# Altium PCB CH32V203F8U6-R0-1v0.PcbDoc
Units mil, origin at the board's own origin, x right, y up, seen from the top; angles counter-clockwise.
Board outline 1440.41 x 1803.86 mil, 2 copper layers (Top Layer, Bottom Layer); 21 components, 33 nets, 104 pads, 255 vias.
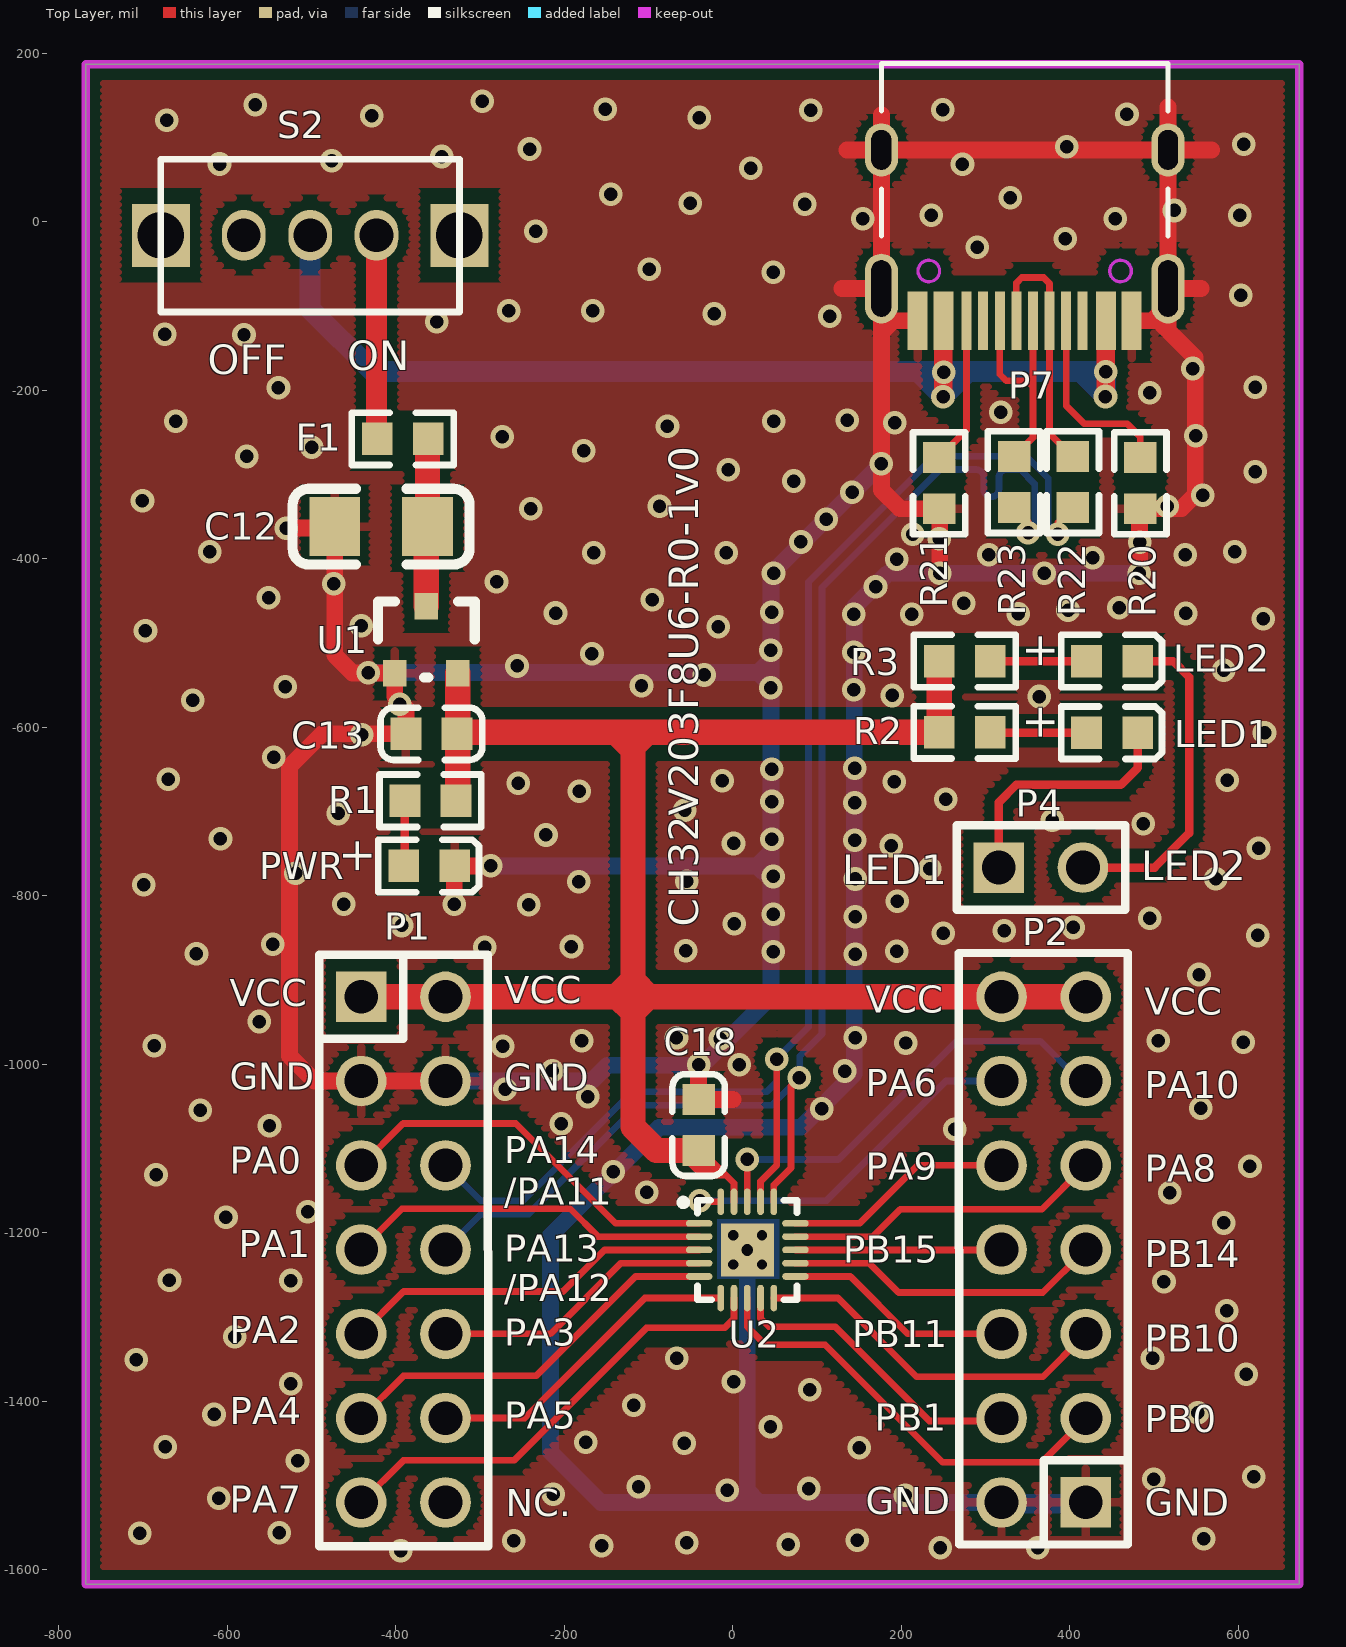
[diagram p0: Top Layer view]
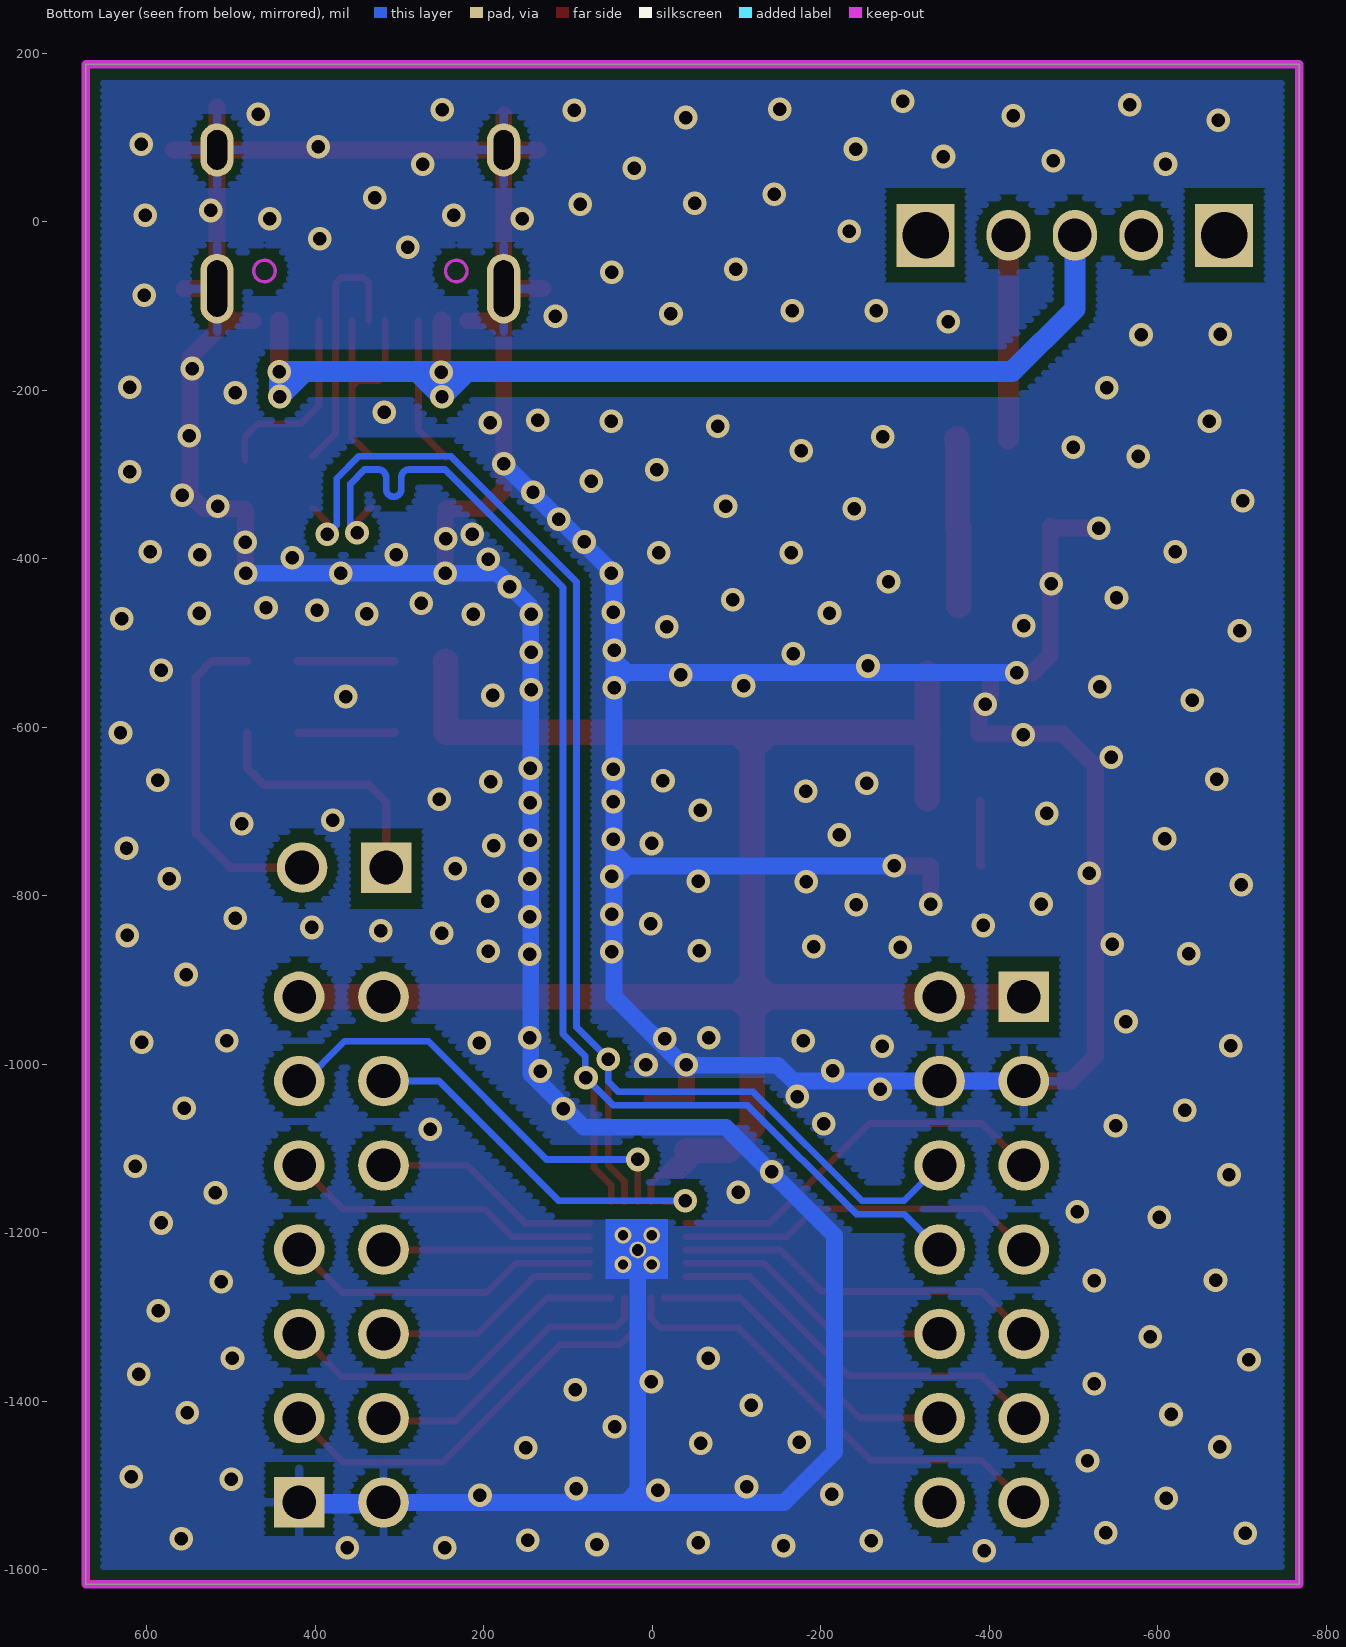
[diagram p1: Bottom Layer view, seen from below]

## Layer stack, top to bottom
Top Solder: solder mask 0.4, Solder Resist, Dk 3.5
Top Layer: signal copper 1.4
Dielectric 1: dielectric 12.6, FR-4, Dk 4.8
Bottom Layer: signal copper 1.4
Bottom Solder: solder mask 0.4, Solder Resist, Dk 3.5

## Board outline
-767.99,-1617.2 -767.99,186.66 672.42,186.66 672.42,-1617.2

## Design rules (kind name [scope] priority, off if disabled: settings)
Clearance Clearance_1 [InPolygon] p1: gap=12 ignorepadtopadclearanceinfootprint=FALSE
Clearance [All] p2: gap=6 ignorepadtopadclearanceinfootprint=FALSE
ComponentClearance [All] p1: gap=0 collisioncheckmode=3 verticalgap=0 showdistances=FALSE
DiffPairsRouting [All] p1: maxlimit=10 minlimit=6 mostfreqgap=8 toplayer_minwidth=6 toplayer_maxwidth=15 toplayer_prefwidth=8 bottomlayer_minwidth=6 bottomlayer_maxwidth=15 bottomlayer_prefwidth=8 maxuncoupledlength=500
PolygonConnect PolygonConnect_1 [IsVia] p1: connectstyle=Direct reliefconductorwidth=10 reliefentries=4 polygonreliefangle="90 Angle" airgapwidth=10
PolygonConnect [All] p2: connectstyle=Relief reliefconductorwidth=10 reliefentries=4 polygonreliefangle="90 Angle" airgapwidth=10
RoutingVias [All] p1: holewidth=16 width=28 viastyle="Through Hole" minholewidth=12 minwidth=18 maxholewidth=28 maxwidth=50
SolderMaskExpansion [All] p1: expansion=4 istentingtop=FALSE
Width [All] p1: maxlimit=100 minlimit=6 preferedwidth=10 minimp=50.000000 maximp=50.000000 favimp=50.000000
28 further rules are at their usual default settings.

## Classes and differential pairs
differential pair US: +PA13/PA12 -PA14/PA11
differential pair usb: +PA11 -PA12

## Components (designator, comment, footprint, x,y, rotation, side; value= is the part's Value field where it differs from the comment)
C12 "10uF" 3216_C -362.33,-361.95 r0 top
C13 "2.2uF" 0603_C -387.9,-607.79 r0 top
C18 "0.1uF" 0603_C -40.52,-1102.4 r90 top value=15pF
F1 "500mA" 0603 -422.01,-257.7 r0 top
LED1 "LED1   blue" 0603+ 420,-606.53 r0 top
LED2 "LED2  blue" 0603+ 420,-521.53 r0 top
P1 "Header 7X2" IDC14-2.54mm -440.96,-919.93 r0 top locked
P2 "Header 7X2" IDC14-2.54mm 418.96,-1519.93 r180 top
P4 "2HEAD" SIP2-2.54mm 315.6,-766.51 r270 top
P7 "TYPE-C" TYPE-C-Receptacle-2.0 346.4,-117.6 r180 top locked
PWR "POWER  red" 0603+ -390.51,-764.63 r0 top
R1 "1K" 0603 -389.09,-687.23 r0 top
R2 "1K" 0603 245,-606.06 r0 top
R3 "1K" 0603 245,-521.53 r0 top
R20 "NC(5.1K)" 0603 483.68,-280.01 r270 top
R21 "NC(5.1K)" 0603 244.93,-280.01 r270 top
R22 "0R" 0603 403.45,-278.79 r270 top
R23 "0R" 0603 333.81,-278.8 r270 top
S2 "SW" SW1 -501.54,-16.15 r0 top
U1 "6219P33M" SOT-23 -401.22,-535.76 r0 top
U2 "CH32V203F8U" QFN20_3x3 17.23,-1220.3 r270 top

## Footprints (in the part's own frame and the unit in brackets; to place one, negate y for a bottom-side part, rotate by r counter-clockwise, add the part's x,y. Pads: shape width x height; smd on the part's side, far side on the other; paste and mask are expansions set on the pad)
0603 [mm]
  rect 0.93x0.98 smd: 1(0,0) 2(1.54,0)
  silkscreen extent -0.76,-0.79 2.3,0.79
0603+ [mm]
  rect 0.93x0.98 smd: 1(0,0) 2(1.54,0)
  silkscreen extent -0.76,-0.79 2.27,0.79
0603_C [mm]
  rect 0.93x0.98 smd: 1(0,0) 2(1.54,0)
  silkscreen extent -0.76,-0.79 2.31,0.79
3216_C [mil]
  rect 60x70 smd: 1(0,0) 2(-110,0)
  silkscreen extent -160,-45 50,45
IDC14-2.54mm [mil]
  rect 60x60 hole 40: 1(0,0)
  round 60 hole 40: 2(100,0) 3(0,-100) 4(100,-100) 5(0,-200) 6(100,-200) 7(0,-300) 8(100,-300) 9(0,-400) 10(100,-400) 11(0,-500) 12(100,-500) 13(0,-600) 14(100,-600)
  silkscreen extent -50,-652 151,50
QFN20_3x3 [mm]
  rect 1.6x1.6 smd mask+0.051: 0(0,0)
  round 0.508 hole 0.356: 0(0,0)
  oval 0.2x0.8 smd mask+0.051: 1(-0.8,-1.451) 2(-0.4,-1.451) 3(0,-1.451) 4(0.4,-1.451) 5(0.8,-1.451) 11(0.8,1.451) 12(0.4,1.451) 13(0,1.451) 14(-0.4,1.451) 15(-0.8,1.451)
  oval 0.8x0.2 smd mask+0.051: 6(1.451,-0.8) 7(1.451,-0.4) 8(1.451,0) 9(1.451,0.4) 10(1.451,0.8) 16(-1.451,0.8) 17(-1.451,0.4) 18(-1.451,0) 19(-1.451,-0.4) 20(-1.451,-0.8)
  silkscreen extent -1.53,-2.03 1.5,1.5
SIP2-2.54mm [mil]
  rect 60x60 hole 40: 1(0,0)
  round 60 hole 40: 2(0,100)
  silkscreen extent -50,-50 50,150
SOT-23 [mm]
  rect 0.7x0.8 smd: 1(0,0) 2(1.9,0) 3(0.95,2.02)
  silkscreen extent -0.51,-0.13 2.41,2.16
SW1 [mm]
  rect 1.75x1.9 hole 1.4: 0(-4.5,0) 0(4.5,0)
  oval 1.321x1.524 hole 1.016: 1(0,0) 2(-2,0) 3(2,0)
  silkscreen extent -4.51,-2.31 4.5,2.29
TYPE-C-Receptacle-2.0 [mm]
  oval 1x2.1 hole 0.6 slot 1.7 at 90 deg: 0(-4.32,-0.97) 0(4.32,-0.97)
  oval 1x1.6 hole 0.6 slot 1.2 at 90 deg: 0(-4.32,-5.15) 0(4.32,-5.15)
  rect 0.6x1.75 smd: A1(-3.225,0) A4(-2.45,0) B1(3.225,0) B4(2.45,0)
  rect 0.3x1.75 smd: A5(-1.25,0) A6(-0.25,0) A7(0.25,0) A8(1.25,0) B5(1.75,0) B6(0.75,0) B7(-0.75,0) B8(-1.75,0)
  Keep-Out Layer circle w0.1: c2.89,-1.5 r0.325
  Keep-Out Layer circle w0.1: c-2.89,-1.5 r0.325
  silkscreen extent -4.32,-7.75 4.32,-2.55

## Part data
C12 C13: library part CAP, "Capacitor"
C18: library part Cap, "Capacitor", LatestRevisionDate=17-Jul-2002, LatestRevisionNote="Re-released for DXP Platform.", PackageReference=RAD-0.3, Published=8-Jun-2000, Publisher="Altium Limited"
F1: library part FUSE1, "Fuse"
LED1 LED2 PWR: library part LED0, "Typical INFRARED GaAs LED", LatestRevisionDate=08-Jul-2005, LatestRevisionNote="Mech Layer 1 removed.", PackageReference=LED-0, Published=8-Jun-2000, Publisher="Altium Limited"
P1 P2: "Header, 7-Pin, Dual row", LatestRevisionDate=17-Jul-2002, LatestRevisionNote="Re-released for DXP Platform.", Publisher="Altium Limited"
P7: library part TYPE-C1
R1 R2 R3: library part "Res Semi", "Semiconductor Resistor", LatestRevisionDate=17-Jul-2002, LatestRevisionNote="Re-released for DXP Platform.", PackageReference=AXIAL-0.5, Published=8-Jun-2000, Publisher="Altium Limited"
R20 R21 R22 R23: library part Res2, "Resistor"
U2: "RISC-V LMD-MCU, 144MHz, for motor & wireless charging"

## Via types
v1: diameter 28, hole 16, Top Layer to Bottom Layer, tented both sides, 251 vias
v2: diameter 20, hole 12, Top Layer to Bottom Layer, tented both sides, 4 vias

## Nets (pads, with @x,y where several pads share a name; then routed paths per layer and width w, separated by ;. In a path a pad name is that pad's centre, name@x,y a point inside that pad or via, vN(x,y) a via of type N, cw(c..) or ccw(c..) an arc to the next point about the centre after c; other vN are vias at no path point)
+5V: P7.A4 P7.B4 S2.1 | length 1430.3
  Top Layer w22: v1@249.94,-210.35 P7.B4 ; v1(442.29,-207.51) 442.86,-206.94 P7.A4
  Bottom Layer w25: S2.1 -501.54,-103.6 -427.1,-178.05 220,-178.05 ; 220,-178.05 v1@250.29,-178.05 ; 220,-178.05 v1(249.52,-207.57) ; v1(249.52,-207.57) 279.04,-178.05 ; v1(249.52,-207.57) 249.52,-178.82 v1@250.29,-178.05 ; v1@250.29,-178.05 279.04,-178.05 ; 279.04,-178.05 412.83,-178.05 ; 412.83,-178.05 v1(442.88,-178.05) 442.29,-178.63 v1(442.29,-207.51) 412.83,-178.05
  other v1: 250.29,-178.74
GND: C12.2 C13.1 C18.2 P1.3 P1.4 P2.1 P2.2 P7.0 P7.A1 P7.B1 PWR.2 R20.2 R21.2 U1.1 U2.0 | length 8178.7
  Top Layer w20: v1(-529.89,-363.75) -474.13,-363.75 C12.2 -472.33,-514.62 -451.19,-535.76 U1.1 -401.22,-563.67 -387.9,-576.99 C13.1 -487.5,-607.79 -526.13,-646.42 -526.13,-990.22 -496.41,-1019.93 P1.3 P1.4 ; v1(-330.58,-810.29) -330.58,-765.32 PWR.2 v1(-287.17,-764.63) ; v1(-40.52,-1000.57) C18.2 0.15,-1041.77 ; 129.6,-79.41 P7.0@164.8,-79.41 ; 135.54,85.16 P7.0@164.53,85.16 ; 176.32,126.9 P7.0@176.32,96.95 ; P7.B1 189.98,-117.6 ; v1(245.61,-417.28) 245.61,-348.26 241.46,-344.11 R21.2 198.2,-340.64 176.32,-318.76 176.32,-131.26 ; P7.A1 497.94,-117.6 ; v1(482.59,-417.18) 482.59,-345.91 481.9,-345.22 R20.2@483.68,-343.44 ; R20.2 532.42,-340.64 548.8,-324.26 548.8,-161.26 516.48,-128.94 ; P7.0@516.48,-64.59 P7.0@516.48,-65.54 ; 516.48,136.02 P7.0@516.48,97.35 ; 555.6,-79.41 P7.0@530.35,-79.41 ; 568.34,85.16 P7.0@528.67,85.16 ; P7.0@164.53,85.16 P7.0@176.32,96.95 ; P7.0@164.53,85.16 P7.0@176.32,73.36 ; P7.0@164.53,85.16 P7.0@176.32,85.16 ; P7.0@164.8,-79.41 P7.0@176.32,-90.93 ; P7.0@164.8,-79.41 P7.0@176.32,-67.88 ; P7.0@164.8,-79.41 P7.0@176.32,-79.41 ; 176.32,-131.26 P7.0@176.32,-116.55 ; 176.32,-131.26 189.98,-117.6 ; P7.0@176.32,-116.55 P7.0@176.32,-103.93 ; P7.0@176.32,-116.55 177.37,-117.6 189.98,-117.6 ; P7.0@176.32,-103.93 P7.0@176.32,-90.93 ; P7.0@176.32,-103.93 189.98,-117.6 ; P7.0@176.32,-90.93 P7.0@176.32,-79.41 ; P7.0@176.32,-79.41 P7.0@176.32,-67.88 ; P7.0@176.32,-67.88 P7.0@176.32,73.36 ; P7.0@176.32,73.36 P7.0@188.12,85.16 ; P7.0@176.32,73.36 P7.0@176.32,85.16 ; P7.0@176.32,85.16 P7.0@176.32,96.95 ; P7.0@176.32,85.16 P7.0@188.12,85.16 ; P7.0@176.32,96.95 P7.0@188.12,85.16 ; P7.0@188.12,85.16 P7.0@504.29,85.16 ; 497.94,-117.6 505.14,-117.6 ; 497.94,-117.6 P7.0@516.48,-99.05 ; P7.0@504.29,85.16 P7.0@516.48,72.97 ; P7.0@504.29,85.16 P7.0@516.48,97.35 ; P7.0@504.29,85.16 P7.0@516.48,85.16 ; 505.14,-117.6 515.32,-117.6 P7.0@516.48,-116.43 ; 505.14,-117.6 516.48,-128.94 ; 516.48,-128.94 P7.0@516.48,-116.43 ; P7.0@516.48,-116.43 P7.0@516.48,-99.05 ; P7.0@516.48,-99.05 P7.0@516.48,-93.28 ; P7.0@516.48,-93.28 P7.0@530.35,-79.41 ; P7.0@516.48,-93.28 P7.0@516.48,-79.41 ; P7.0@516.48,-79.41 P7.0@516.48,-65.54 ; P7.0@516.48,-79.41 P7.0@530.35,-79.41 ; P7.0@516.48,-65.54 P7.0@530.35,-79.41 ; P7.0@516.48,-65.54 P7.0@516.48,72.97 ; P7.0@516.48,72.97 P7.0@528.67,85.16 ; P7.0@516.48,72.97 P7.0@516.48,85.16 ; P7.0@516.48,85.16 P7.0@516.48,97.35 ; P7.0@516.48,85.16 P7.0@528.67,85.16 ; P7.0@516.48,97.35 P7.0@528.67,85.16
  Bottom Layer w20: P1.3 P1.4 -167.41,-1019.93 -148.63,-1001.15 -36.42,-1001.15 45.35,-919.38 v1@45.35,-780.96 ; v1(-432.7,-535.18) 30.15,-535.18 ; v1(-287.17,-764.63) 29.02,-764.63 ; U2.0@17.23,-1220.3 17.23,-1505.92 ; v1(176.2,-287.54) 45.35,-418.39 v1@45.35,-513.61 ; v1(245.61,-417.28) 183.91,-417.28 144.14,-457.05 144.14,-1011.76 81.1,-1074.8 -87.72,-1074.8 -216.16,-1203.24 -216.16,-1460.38 -156.6,-1519.93 3.21,-1519.93 ; v1@248.77,-417.18 v1(482.59,-417.18) ; P2.2@315.6,-1523.24 P2.1@415.6,-1523.24 ; P2.1 P2.2 31.25,-1519.93 ; 3.21,-1519.93 17.23,-1505.92 ; 3.21,-1519.93 15.23,-1519.93 ; 15.23,-1519.93 31.25,-1519.93 ; 15.23,-1519.93 17.23,-1517.93 17.23,-1505.92 ; 17.23,-1505.92 31.25,-1519.93 ; 29.02,-764.63 45.35,-748.3 ; 29.02,-764.63 v1@45.35,-780.96 ; 29.02,-764.63 43.57,-764.63 45.35,-762.85 ; 30.15,-535.18 44.81,-520.52 44.81,-514.15 v1@45.35,-513.61 ; 30.15,-535.18 41.09,-535.18 45.35,-530.92 ; 30.15,-535.18 v1@45.35,-550.37 ; v1@45.35,-780.96 45.35,-762.85 ; 45.35,-762.85 45.35,-748.3 ; 45.35,-748.3 v1@45.35,-550.37 ; v1@45.35,-550.37 45.35,-530.92 ; 45.35,-530.92 v1@45.35,-513.61
  other v1: -393.96,-1577.13 246.11,-1573.9 362.14,-1573.9 -155.77,-1571.59 65.6,-1569.93 -54.39,-1567.94 -260.05,-1565.49 147.92,-1564.97 559.09,-1563.05 -703.96,-1556.78 -538.44,-1556.18 -609.85,-1515.23 204.45,-1511.42 -212.86,-1510.32 -6.79,-1505.47 90.4,-1503.48 -111.9,-1501.26 499.75,-1492.65 618.42,-1489.48 -516.54,-1470.35 149.9,-1454.89 -673.44,-1454.18 -57.58,-1449.73 -174.57,-1448.34 44.78,-1430.09 -615.66,-1415.63 551.97,-1413.54 -117.47,-1404.48 91.39,-1386.46 -524.41,-1379.26 0.9,-1376.62 609.58,-1368.06 -708.19,-1350.73 -66.64,-1348.77 498.17,-1348.66 -590.98,-1323.22 586.18,-1292.44 511.74,-1258.25 -524.41,-1256.65 -668.51,-1256.18 582.61,-1188.32 -601.48,-1181.33 -504.28,-1175.21 -101.89,-1151.98 518.36,-1152.41 -684.48,-1131.15 -141.89,-1127.48 613.8,-1121.23 263.28,-1077.16 -549.82,-1072.74 -203.41,-1070.76 -632.14,-1054.35 105.38,-1052.7 555.21,-1052.25 -171.94,-1038.28 -270.3,-1029.79 -214.33,-1007.7 133.11,-1008.03 7.44,-1000.55 -272.78,-978.66 -686.61,-977.79 205.4,-974.74 605.76,-973.68 -179.32,-972.1 505.13,-971.93 -14.69,-969.91 145.43,-968.76 -66.82,-968.28 -562.2,-949.29 553.31,-893.49 -636.5,-868.94 145.49,-869.33 47.87,-866.36 194.51,-865.86 -55.78,-865.46 -294.29,-861.34 -191.44,-860.28 -545.79,-857.71 623.16,-847.11 249.65,-844.61 322.36,-841.38 404.29,-837.66 -392.87,-835.25 1.78,-833.09 495.01,-826.54 145.49,-824.7 47.87,-821.74 -461.54,-809.8 -242.34,-810.44 195.24,-806.53 -699.05,-786.78 -182.95,-783.3 -54.59,-782.73 145.49,-780.08 573.33,-779.86 47.87,-777.12 -518.79,-773.34 233.97,-767.7 623.96,-743.47 187.93,-740.38 0.87,-737.94 144.63,-734.17 46.51,-732.79 -607.98,-732.43 -221.7,-727.86 487.1,-714.55 379.05,-710.58 -468.05,-702.35 -57.08,-698.47 144.63,-689.55 46.51,-688.17 252.97,-685.32 -182.22,-675.79 -254.45,-666.55 -12.72,-663.67 191.46,-664.47 586.78,-662.78 -670.18,-661.68 46.05,-649.87 144.53,-648.87 -544.92,-635.68 -440.48,-608.77 631.08,-606.61 -395.24,-572.89 -641.07,-567.8 363.84,-563.54 189.34,-562.32 143.57,-555.61 45.05,-553.08 -531.17,-551.95 -108.33,-550.94 -33.98,-537.97 582.82,-532.24 -256.05,-527.28 -167.12,-512.89 143.57,-510.99 45.05,-508.46 -696.99,-485.69 -17.41,-480.52 -441.03,-479.6 629.5,-471.33 143.7,-466.03 212.58,-465.79 338.8,-465.59 537.73,-465 -210.35,-464.48 46.29,-463.42 397.87,-461.2 458.41,-458.27 274.34,-452.9 -95.36,-448.92 -550.97,-446.48 169.4,-433.32 -473.4,-429.69 -280.39,-427.3 48.38,-417.15 369.55,-417.24 194.47,-400.78 427.17,-398.7 303.64,-395.16 536.94,-395.38 -164.92,-392.97 -7.82,-392.97 -620.84,-391.69 595.86,-391.92 482.83,-380.63 80.92,-380.12 244.87,-376.13 213.83,-370.76 110.78,-353.25 -239.73,-340.72 -86.97,-337.81 515.54,-337.67 -700.56,-330.99 557.67,-324.77 141.53,-321.01 72.53,-307.83 620.17,-297 -5.41,-294.62 -576.82,-278.64 -176.65,-272.01 -499.63,-267.51 -273.53,-255.11 549.57,-254.18 -77.51,-242.72 192.28,-238.44 -661.3,-236.99 48.54,-237.06 136.09,-235.87 318.16,-226.01 495.01,-203.14 -539.18,-197.22 620.18,-196.31 546.09,-174.31 -674.29,-133.74 -580.07,-134.36 -351.21,-118.62 114.87,-112.39 -22.21,-109.45 -266.01,-105.53 -166.2,-105.82 602.81,-87.51 47.97,-60.09 -99.31,-56.23 290.06,-30.28 394.5,-20.41 -233.71,-11.54 154.36,3.68 454.06,3.68 601.66,7.39 235.47,7.8 524.18,13.3 85.5,20.77 -50.6,21.75 329.19,28.26 -144.59,32.53 21.36,63.4 -609.12,68.39 272.59,68.29 -475.93,72.49 -345.62,77.31 -241.23,86.22 396.32,88.91 606.29,91.88 -671.55,120.58 -39.83,123.58 -428.38,125.84 467.81,127.41 92.34,132.39 -151.46,133.38 249.22,132.91 -566.81,138.67 -297.1,142.95
  other v2: 0.6,-1237.7 34.9,-1237.7 0.6,-1202.9 34.9,-1202.9
LED1: LED1.2 P4.1 | length 301.1
  Top Layer w10: P4.1 315.6,-689.16 336.27,-668.5 460.44,-668.5 480.63,-648.31 LED1.2
LED2: LED2.2 P4.2 | length 396.9
  Top Layer w10: P4.2 500.65,-766.51 541.59,-725.57 541.59,-540.37 522.75,-521.53 LED2.2
NetC12_1: C12.1 F1.2 U1.3 | length 199.5
  Top Layer w30: U1.3 -363.82,-363.44 C12.1 -362.33,-258.65 F1.2
NetF1_1: F1.1 S2.3 | length 241.9
  Top Layer w25: S2.3 -422.8,-256.9 F1.1
NetLED1_1: LED1.1 R2.2 | length 114.6
  Top Layer w10: R2.2 306.1,-606.53 LED1.1
NetLED2_1: LED2.1 R3.2 | length 114.4
  Top Layer w10: R3.2 LED2.1
NetP7_A5: P7.A5 R20.1 | length 231.5
  Top Layer w8: P7.A5 395.61,-218.14 417.35,-239.88 468.22,-239.88 483.68,-255.35 R20.1 R20.1@483.68,-282.81
NetP7_B5: P7.B5 R21.1 | length 175.9
  Top Layer w8: R21.1 277.5,-247.44 P7.B5
NetPWR_1: PWR.1 R1.1 | length 78
  Top Layer w10: PWR.1 -389.09,-763.2 R1.1
PA0: P1.5 U2.1 | length 470.8
  Top Layer w8: P1.5 -391.19,-1070.16 -257.53,-1070.16 -138.89,-1188.8 U2.1
PA1: P1.7 U2.2 | length 434.8
  Top Layer w8: P1.7 -392.53,-1171.51 -192.86,-1171.51 -159.81,-1204.55 U2.2
PA2: P1.9 U2.3 | length 442.3
  Top Layer w8: P1.9 -390.61,-1269.59 -201.57,-1269.59 -152.28,-1220.3 U2.3
PA3: P1.10 U2.4 | length 335.8
  Top Layer w8: P1.10 -216.48,-1319.93 -132.6,-1236.05 U2.4
PA4: P1.11 U2.5 | length 470.7
  Top Layer w8: P1.11 -390.81,-1369.79 -233.39,-1369.79 -115.4,-1251.79 U2.5
PA5: P1.12 U2.6 | length 385.7
  Top Layer w8: P1.12 -246.87,-1419.93 -104.36,-1277.43 U2.6
PA6: P2.12 U2.20 | length 463
  Top Layer w8: v1@-42.74,-1163.16 U2.20
  Bottom Layer w8: v1(-39.01,-1161.88) 111.18,-1161.88 ; 123.74,-1149.32 111.18,-1161.88 ; P2.12 253.13,-1019.93 111.18,-1161.88
PA7: P1.13 U2.7 | length 556.9
  Top Layer w8: P1.13 -391.02,-1470 -259.63,-1470 -102.45,-1312.82 -9.94,-1312.82 1.48,-1301.39 U2.7
PA8: P2.9 U2.14 | length 374.9
  Top Layer w8: U2.14 166.24,-1204.56 198.61,-1172.18 366.66,-1172.18 P2.9@415.6,-1123.24
PA9: P2.10 U2.15 | length 273.1
  Top Layer w8: U2.15 150.52,-1188.81 219.39,-1119.93 P2.10
PA10: P2.11 U2.18 | length 527.7
  Top Layer w8: U2.18 v1(17.23,-1112.98)
  Bottom Layer w8: v1(17.23,-1112.98) 125.46,-1112.98 265.89,-972.55 364.91,-972.55 P2.11@415.6,-1023.24
PA11: P7.A7 P7.B7 R22.1 | length 306.8
  Top Layer w8: P7.A7 336.56,-72.68 343,-66.24 368.91,-66.24 375.93,-73.26 P7.B7 375.93,-251.27 R22.1
PA12: P7.A6 P7.B6 R23.1 | length 296.2
  Top Layer w8: P7.B6 316.87,-181.08 324.45,-188.66 349.26,-188.66 ; R23.1 356.24,-256.37 356.24,-195.64 ; P7.A6 356.24,-180.27 356.24,-181.68 ; 349.26,-188.66 356.24,-181.68 ; 349.26,-188.66 356.24,-188.66 ; 349.26,-188.66 356.24,-195.64 ; 356.24,-195.64 356.24,-188.66 ; 356.24,-188.66 356.24,-181.68
PA13/PA12: P1.8 R23.2 U2.16 | length 1720.9
  Top Layer w8: U2.16 48.73,-1143.36 69.01,-1123.08 69.01,-1025.74 v1(78.68,-1016.08) ; R23.2 350.38,-355.99 v1(350.38,-369.34)
  Bottom Layer w8: P1.8 -298.96,-1177.93 -242.33,-1177.93 -113.09,-1048.7 46.05,-1048.7 v1(78.68,-1016.08) ; v1@79.39,-1016.08 79.39,-990.72 105.91,-964.2 105.91,-434.34 245.99,-294.26 284.64,-294.26 288.82,-294.26 cw(c288.82,-303.26) 297.82,-303.26 297.82,-317.43 ccw(c306.82,-317.43) 306.82,-326.43 ccw(c306.82,-317.43) 315.82,-317.43 315.82,-303.26 cw(c324.82,-303.26) 324.82,-294.26 341.43,-294.26 358.31,-311.14 358.31,-361.41 v1(350.38,-369.34)
PA14/PA11: P1.6 R22.2 U2.17 | length 1721.8
  Top Layer w8: U2.17 32.98,-1138.93 52.25,-1119.66 v1(52.25,-993.94) ; v1(385.86,-370.91) 385.86,-357.01 R22.2
  Bottom Layer w8: P1.6 -298.96,-1161.93 -248.96,-1161.93 -119.72,-1032.7 39.97,-1032.7 52.25,-1020.42 v1(52.25,-993.94) ; v1@52.09,-993.78 89.91,-955.96 89.91,-427.71 239.36,-278.26 348.06,-278.26 374.31,-304.51 374.31,-359.36 v1(385.86,-370.91)
PB0: P2.3 U2.8 | length 519.5
  Top Layer w8: U2.8 17.23,-1311.59 38.61,-1332.97 109.7,-1332.97 249.16,-1472.43 366.42,-1472.43 P2.3@415.6,-1423.24
PB1: P2.4 U2.9 | length 357.2
  Top Layer w8: U2.9 32.98,-1301.71 42.71,-1311.44 121.46,-1311.44 233.27,-1423.24 P2.4@315.6,-1423.24
PB10: P2.5 U2.10 | length 425.4
  Top Layer w8: U2.10 124.82,-1277.43 218.35,-1370.96 367.89,-1370.96 P2.5@415.6,-1323.24
PB11: P2.6 U2.11 | length 272.8
  Top Layer w8: U2.11 139.55,-1251.8 207.68,-1319.93 P2.6
PB14: P2.7 U2.12 | length 375.5
  Top Layer w8: U2.12 161.9,-1236.05 196.84,-1270.99 367.86,-1270.99 P2.7@415.6,-1223.24
PB15: P2.8 U2.13 | length 244.8
  Top Layer w8: U2.13 318.59,-1220.31 P2.8
VCC: C13.2 C18.1 P1.1 P1.2 P2.13 P2.14 R1.2 R2.1 R3.1 U1.2 U2.19 | length 2726.2
  Top Layer w8: U2.19 1.48,-1141.23 -8.02,-1131.72 ; C18.1@-56.43,-1111.39 C18.1@-52.19,-1115.63 ; C18.1@-56.43,-1111.39 -56.43,-1102.4 C18.1@-56.43,-1096.21 ; C18.1@-56.43,-1111.39 -62.61,-1105.21 -62.61,-1102.4 C18.1@-56.43,-1096.21 ; C18.1@-56.43,-1096.21 C18.1@-51.09,-1096.21 ; C18.1@-52.19,-1115.63 -51.09,-1114.54 C18.1@-51.09,-1112.97 ; C18.1@-52.19,-1115.63 C18.1@-48.18,-1119.64 ; C18.1@-52.19,-1115.63 -52.19,-1114.07 C18.1@-51.09,-1112.97 ; C18.1@-51.09,-1112.97 -51.09,-1102.4 C18.1@-51.09,-1096.21 ; C18.1@-51.09,-1112.97 C18.1@-44.98,-1106.86 ; C18.1@-51.09,-1096.21 C18.1@-43.53,-1096.21 ; C18.1@-48.18,-1119.64 C18.1@-44.98,-1116.45 ; C18.1@-48.18,-1119.64 C18.1@-44.98,-1119.64 ; C18.1@-48.18,-1119.64 -36.1,-1131.72 -28.11,-1131.72 ; C18.1@-44.98,-1119.64 C18.1@-44.98,-1116.45 ; C18.1@-44.98,-1119.64 -40.84,-1119.64 C18.1@-40.52,-1119.32 ; C18.1@-44.98,-1116.45 -43.53,-1115 C18.1@-43.53,-1105.41 ; C18.1@-44.98,-1116.45 C18.1@-44.98,-1106.86 ; C18.1@-44.98,-1106.86 C18.1@-43.53,-1105.41 ; C18.1@-43.53,-1105.41 -43.53,-1102.4 C18.1@-43.53,-1096.21 ; C18.1@-43.53,-1105.41 C18.1 C18.1@-40.52,-1109.79 ; C18.1@-43.53,-1096.21 -8.02,-1131.72 ; C18.1@-40.52,-1119.32 C18.1@-40.52,-1109.79 ; C18.1@-40.52,-1119.32 -28.11,-1131.72 ; C18.1@-40.52,-1109.79 -18.59,-1131.72 ; -28.11,-1131.72 -18.59,-1131.72 ; -18.59,-1131.72 -8.02,-1131.72
  Top Layer w30: P1.1 P1.2 -138.53,-919.93 ; R1.2@-326.42,-685.19 C13.2@-326.42,-607.79 ; U1.2 C13.2@-326.42,-606.93 ; C13.2@-325.67,-606.18 C13.2@-326.42,-606.93 ; C18.1 -43.53,-1102.4 -51.09,-1102.4 -56.43,-1102.4 -62.61,-1102.4 -90.64,-1102.4 -118.53,-1074.5 -118.53,-938.01 ; R3.1 R2.1 -101.81,-606.06 ; P2.13 P2.14 -99.24,-919.93 ; C13.2@-326.42,-607.79 C13.2@-326.42,-606.93 ; C13.2@-326.42,-607.79 C13.2 C13.2@-326.42,-606.93 ; C13.2@-326.42,-606.93 -325.54,-606.06 -138.64,-606.06 ; -138.64,-606.06 -119.78,-606.06 ; -138.64,-606.06 -118.53,-626.17 ; -138.53,-919.93 -136.61,-919.93 ; -138.53,-919.93 -118.53,-899.93 ; -136.61,-919.93 -118.53,-919.93 ; -136.61,-919.93 -118.53,-938.01 ; -119.78,-606.06 -101.81,-606.06 ; -119.78,-606.06 -118.53,-607.31 -118.53,-622.77 ; -118.53,-938.01 -100.46,-919.93 ; -118.53,-938.01 -118.53,-919.93 ; -118.53,-919.93 -100.46,-919.93 ; -118.53,-919.93 -118.53,-900.64 ; -118.53,-900.64 -99.24,-919.93 ; -118.53,-900.64 -118.53,-899.93 ; -118.53,-899.93 -118.53,-626.17 ; -118.53,-626.17 -118.53,-622.77 ; -118.53,-622.77 -101.81,-606.06 ; -100.46,-919.93 -99.24,-919.93
pads on no net: P1.14 P7.A8 P7.B8 S2.0 S2.2

## Polygon pours and split planes (outlines as drawn)
GND on Bottom Layer "Bottom Layer-GND" (hatched Horizontal grid 8 track 8, remove dead copper, pour order 2): -767.99,186.66 672.42,186.66 672.42,-1619.36 -767.99,-1619.36
GND on Top Layer "Top Layer-GND" (hatched Horizontal grid 8 track 8, remove dead copper, pour order 0): -767.56,186.66 672.42,186.66 672.42,-1619.36 -767.95,-1619.36

## Keep-outs
Keep-Out Layer:
  the board outline again, w10

## Other copper
Bottom Layer:
  rectangle net GND: -18.65,-1254.6 55.2,-1183.75

## Silkscreen, mask and mechanical layers (free items; w line width, h text height)
Top Overlay:
  text "ON" at -457.8,-176.15 h35
  text "OFF" at -622.8,-181.15 h35
  text "LED2" at 484.83,-781.69 h35
  text "LED1" at 130,-786.5 h35
  text "CH32V203F8U6-R0-1v0" at -41.2,-836.57 h35 r90
  text "VCC" at -271.22,-927.33 h32
  text "VCC" at -596.77,-931.31 h32
  text "VCC" at 157.65,-938.95 h32
  text "VCC" at 489.01,-940.94 h32
  text "GND" at -596.77,-1030.48 h32
  text "GND" at -271.22,-1031.33 h32
  text "PA6" at 157.65,-1038.12 h32
  text "PA10" at 489.01,-1040.11 h32
  text "PA14" at -271.22,-1117.58 h32
  text "PA0" at -596.77,-1129.65 h32
  text "PA9" at 157.65,-1137.29 h32
  text "PA8" at 489.01,-1139.28 h32
  text "/PA11" at -271.22,-1166.71 h32
  text "PA1" at -586.11,-1229.2 h32
  text "PA13" at -271.22,-1234.3 h32
  text "PB15" at 130.99,-1235.83 h32
  text "PB14" at 489.01,-1240.94 h32
  text "/PA12" at -271.22,-1281.08 h32
  text "PA2" at -596.77,-1331.31 h32
  text "PA3" at -271.22,-1333.99 h32
  text "PB11" at 141.66,-1335.62 h32
  text "PB10" at 489.01,-1340.94 h32
  text "PA4" at -596.77,-1427.15 h32
  text "PA5" at -271.22,-1432.33 h32
  text "PB1" at 168.31,-1434.79 h32
  text "PB0" at 489.01,-1436.78 h32
  text "PA7" at -596.77,-1532.15 h32
  text "GND" at 157.65,-1533.95 h32
  text "NC." at -269.63,-1536.35 h32
  text "GND" at 489.01,-1535.94 h32
Mechanical 1:
  the board outline again, w10

## Text inside footprints (layer, text, board x,y; h text height)
LED1: Top Overlay "+" at 381.92,-617.52 h40 r90
LED2: Top Overlay "+" at 381.92,-532.52 h40 r90
PWR: Top Overlay "+" at -428.59,-775.62 h40 r90